# EAGLE board solar (EAGLE 8.2.1)
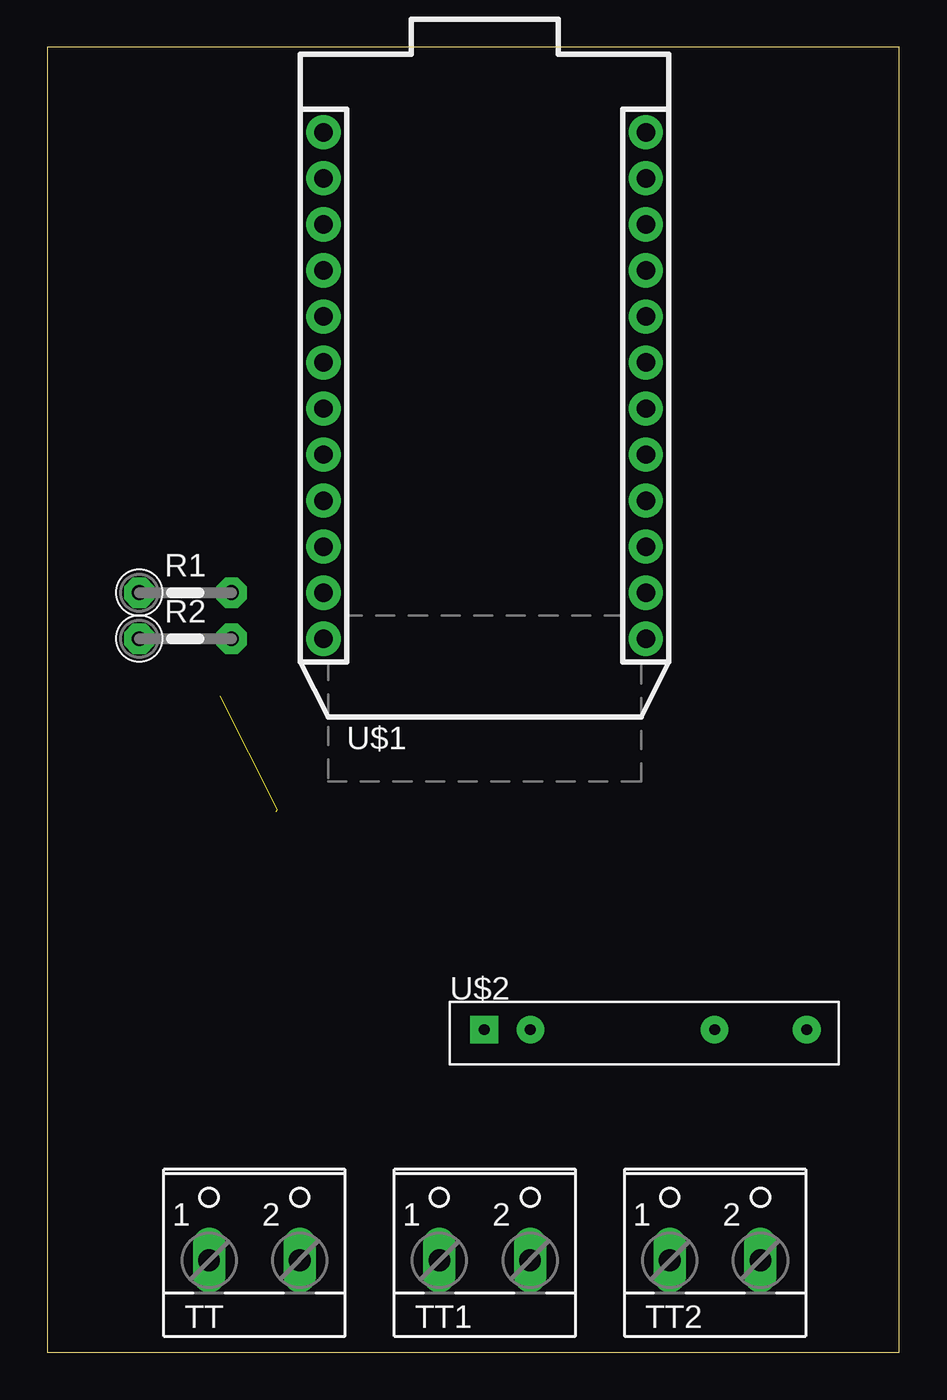
[diagram p0: board, top side]
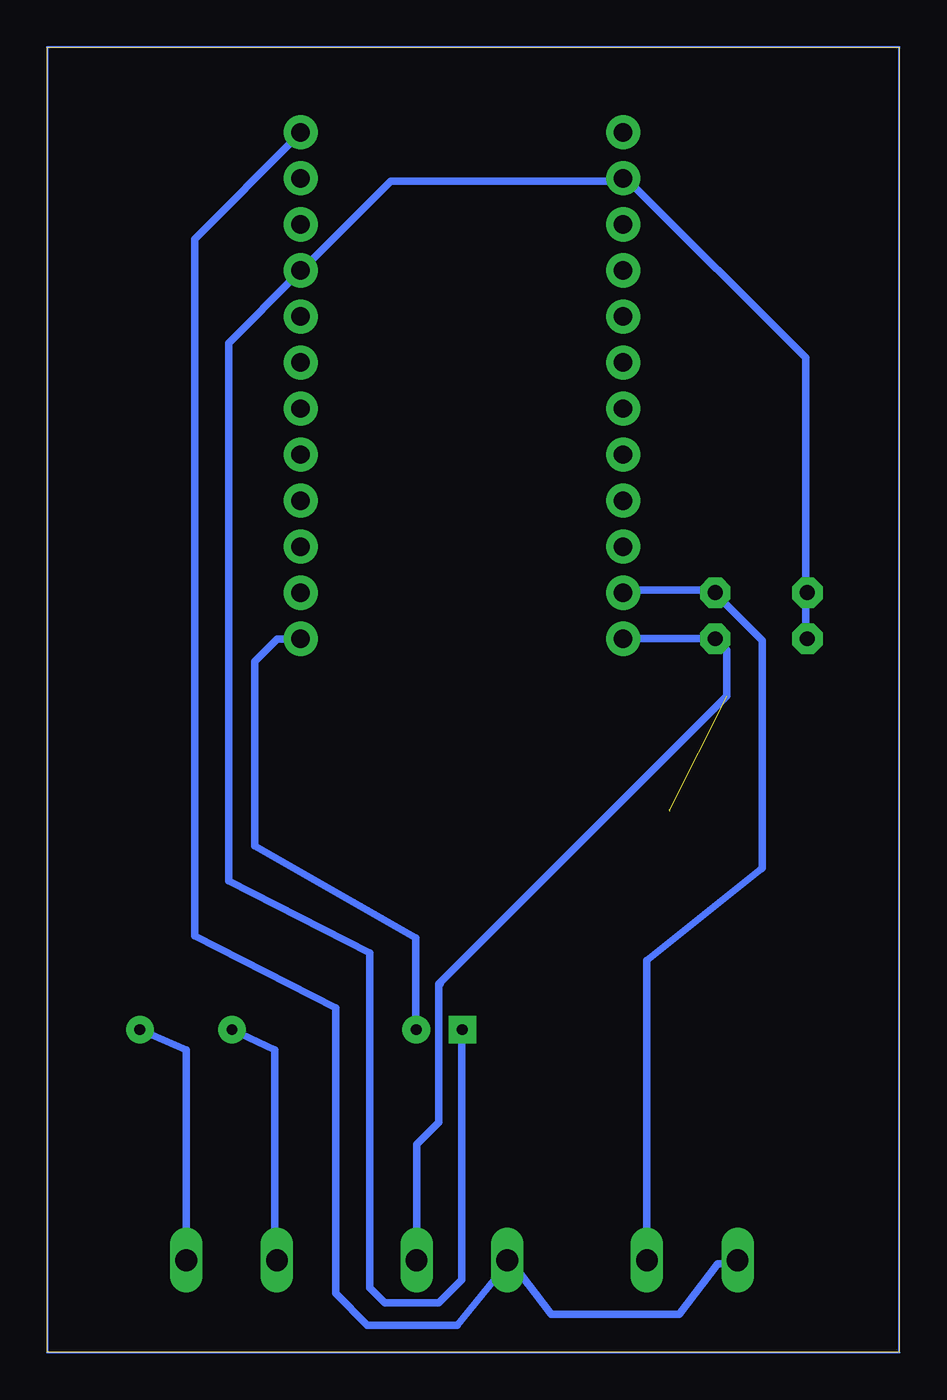
[diagram p1: board, bottom side, seen from below]

Size 47 x 72 mm. Coordinates in mm from the lower left corner, seen from the top.
Outline: 0,0 47,0 47,72 0,72 0,0
Copper layers 16: Bottom 0.035mm
Design rules "default *": minimum track width 10mil, minimum drill 24mil, track to track 8mil, track to pad 8mil, pad to pad 8mil, via to via 8mil, smd to smd 8mil, copper to edge 40mil, drill to drill 8mil, minimum pad ring 10mil, minimum via ring 8mil, stop-mask expansion 4mil, vias tented up to drill 0mil, thermal gap 10mil
Net classes: 0 default: width 0.508 mm

## Footprints (pad centres in the part's own frame; a part is rotated, then mirrored left to right if it is on the bottom)
0207/5V = drill 0.813 pad 1.676 octagon: 1 -2.54,0; 2 2.54,0
W237-102 = drill 1.194 long: 1 -2.5,-1.27; 2 2.5,-1.27
PHOTON = drill 1.016 pad 1.88: 1 -0.001,27.932; 2 -0.001,25.392; 3 -0.001,22.852; 4 -0.001,20.312; 5 -0.001,17.772; 6 -0.001,15.232; 7 -0.001,12.692; 8 -0.001,10.152; 9 -0.001,7.612; 10 -0.001,5.072; 11 -0.001,2.532; 12 -0.001,-0.008; 13 17.779,-0.008; 14 17.779,2.532; 15 17.779,5.072; 16 17.779,7.612; 17 17.779,10.152; 18 17.779,12.692; 19 17.779,15.232; 20 17.779,17.772; 21 17.779,20.312; 22 17.779,22.852; 23 17.779,25.392; 24 17.779,27.932
SIP-POWER = drill 0.6 pad 1.524 square: P$1 1.905,1.905 | drill 0.6 pad 1.524: P$2 4.445,1.905; P$3 14.605,1.905; P$4 19.685,1.905

## Placement (x,y rotation side)
R1  [0207/5V]  7.62,41.91 0 top
R2  [0207/5V]  7.62,39.37 0 top
TT  [W237-102]  11.43,6.35 0 top
TT1  [W237-102]  24.13,6.35 0 top
TT2  [W237-102]  36.83,6.35 0 top
U$1  PHOTON_WITH_HEADERS  [PHOTON]  15.24,39.37 0 top
U$2  [SIP-POWER]  22.2,15.9 0 top

## Library data of the parts
R1 R2 = adafruit
TT TT1 TT2 = con-wago-500; MPN: 237-102; OC_FARNELL: unknown; OC_NEWARK: 70K9898; PARTNO: OSTTC020162
U$1 = Spark
U$2 = geoff

## Nets
3V1: TT2.1
3V3: TT1.1 TT.1 U$1.24
GND: R1.1 R2.1 U$1.2 U$1.21
N$1: R1.2 TT.2 U$1.11
N$2: R2.2 TT1.2 U$1.12
N$4: TT2.2
N$5: U$1.13
VBAT: U$1.22
VIN: U$1.1

## Tracks (layer width: path | path; a pad name or v marks a point on that pad's centre or on a via)
3V1
  Bottom 0.406: 36.79,17.78 34.44,16.68 34.44,5.18 TT2.1
3V3
  Bottom 0.406: TT.1 9.14,4.88 10.01,4.88 12.14,2.11 19.2,2.11 21.34,4.88 TT1.1 21.64,4.88 24.38,1.5 29.34,1.5 31.09,3.25 31.09,19 38.86,22.96 38.86,61.42 33.22,67.06 U$1.24
GND
  Bottom 0.406: R2.1 5.18,39.62 5.18,41.76 R1.1 5.18,42.06 5.18,54.86 14.94,64.62 U$1.2 15.24,64.62 28.04,64.62 32.92,59.74 U$1.21 33.22,59.44 36.98,55.68 36.98,26.01 29.21,22.05 29.21,3.56 28.4,2.74 25.4,2.74 24.13,4.01 24.13,17.78
N$1
  Bottom 0.406: U$1.11 14.94,42.06 10.36,42.06 R1.2 10.06,41.76 7.57,39.27 7.57,26.72 7.62,26.67 13.93,21.63 TT.2 13.72,5.18
N$2  (2 unrouted)
  Bottom 0.406: TT1.2 26.63,11.47 25.4,12.7 25.4,20.32 | 25.4,20.32 25.34,20.32 | U$1.12 R2.2 9.53,38.73 9.53,36.2 25.4,20.32
N$4
  Bottom 0.406: 41.87,17.78 39.32,16.68 39.32,5.18 TT2.2
N$5
  Bottom 0.406: 26.82,17.98 26.67,17.78 26.67,22.86 35.56,27.94 35.56,38.1 34.3,39.36 U$1.13 32.92,39.32
S$1
  Bottom 0.1: 0,72 47,72 47,0 0,0 0,72